# Altium PCB EJ8_ANALOG_PCB.PcbDoc
Units mm, origin at the board's own origin, x right, y up, seen from the top; angles counter-clockwise.
Board outline 46.74 x 76.2 mm, 2 copper layers (Top Layer, Bottom Layer); 31 components, 44 nets, 94 pads, 20 vias.
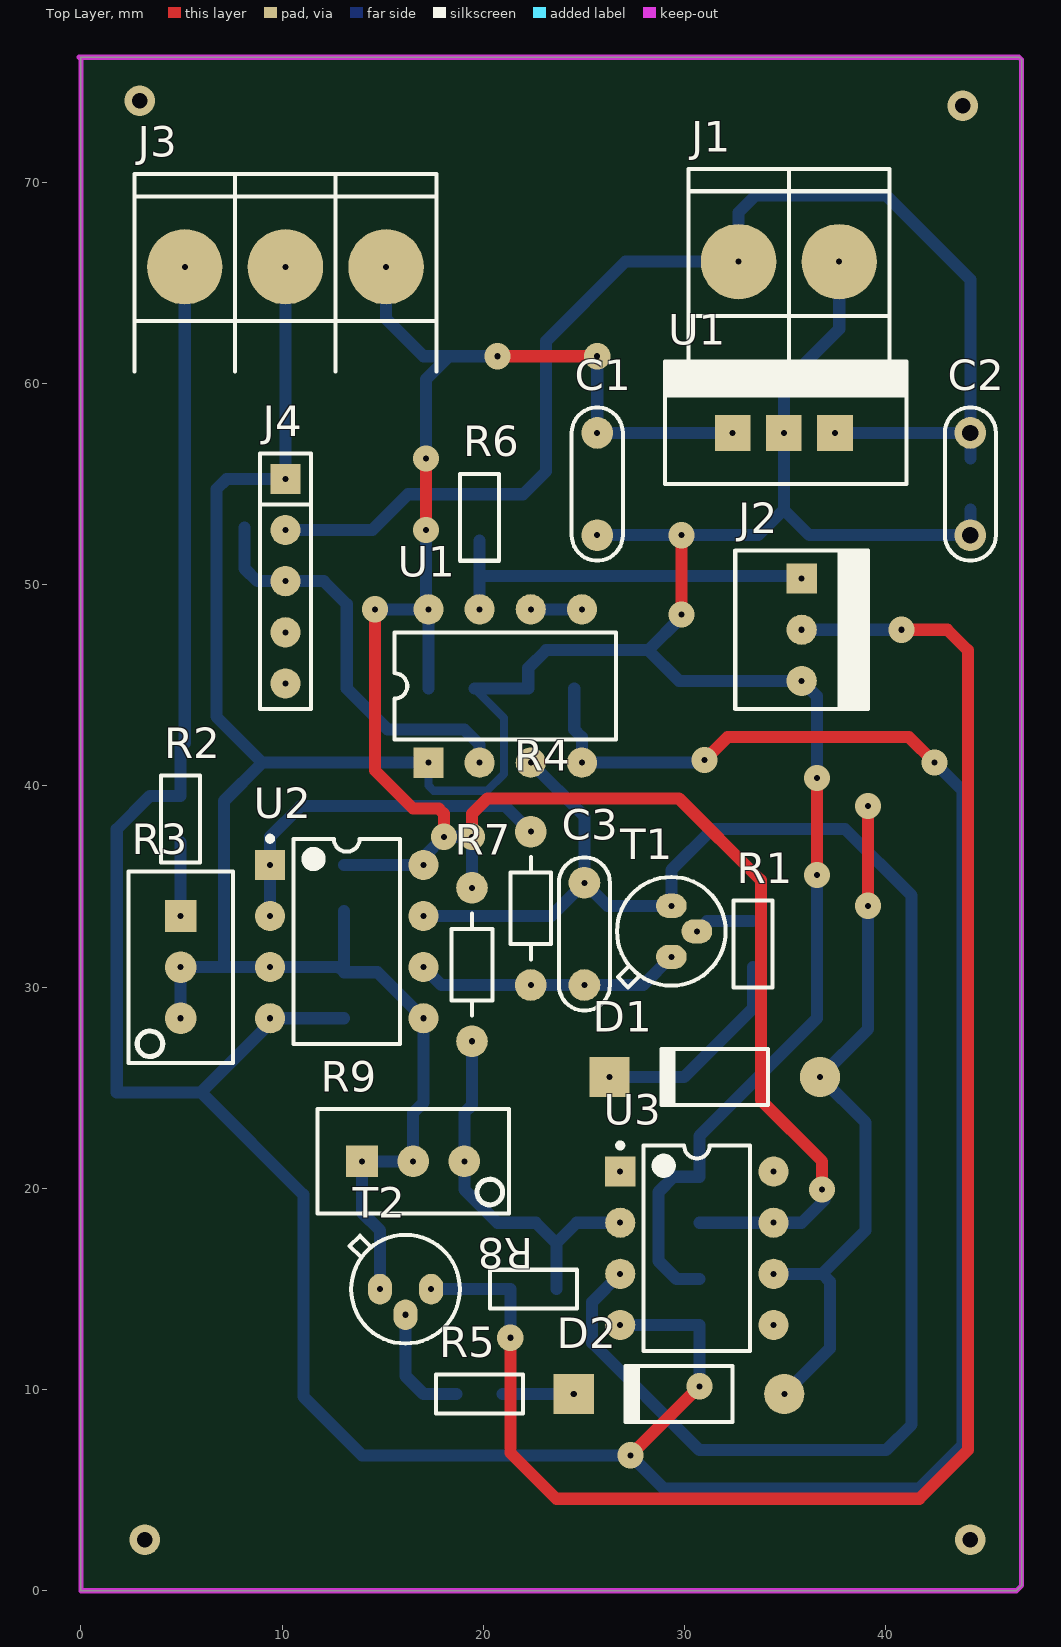
[diagram p0: Top Layer view]
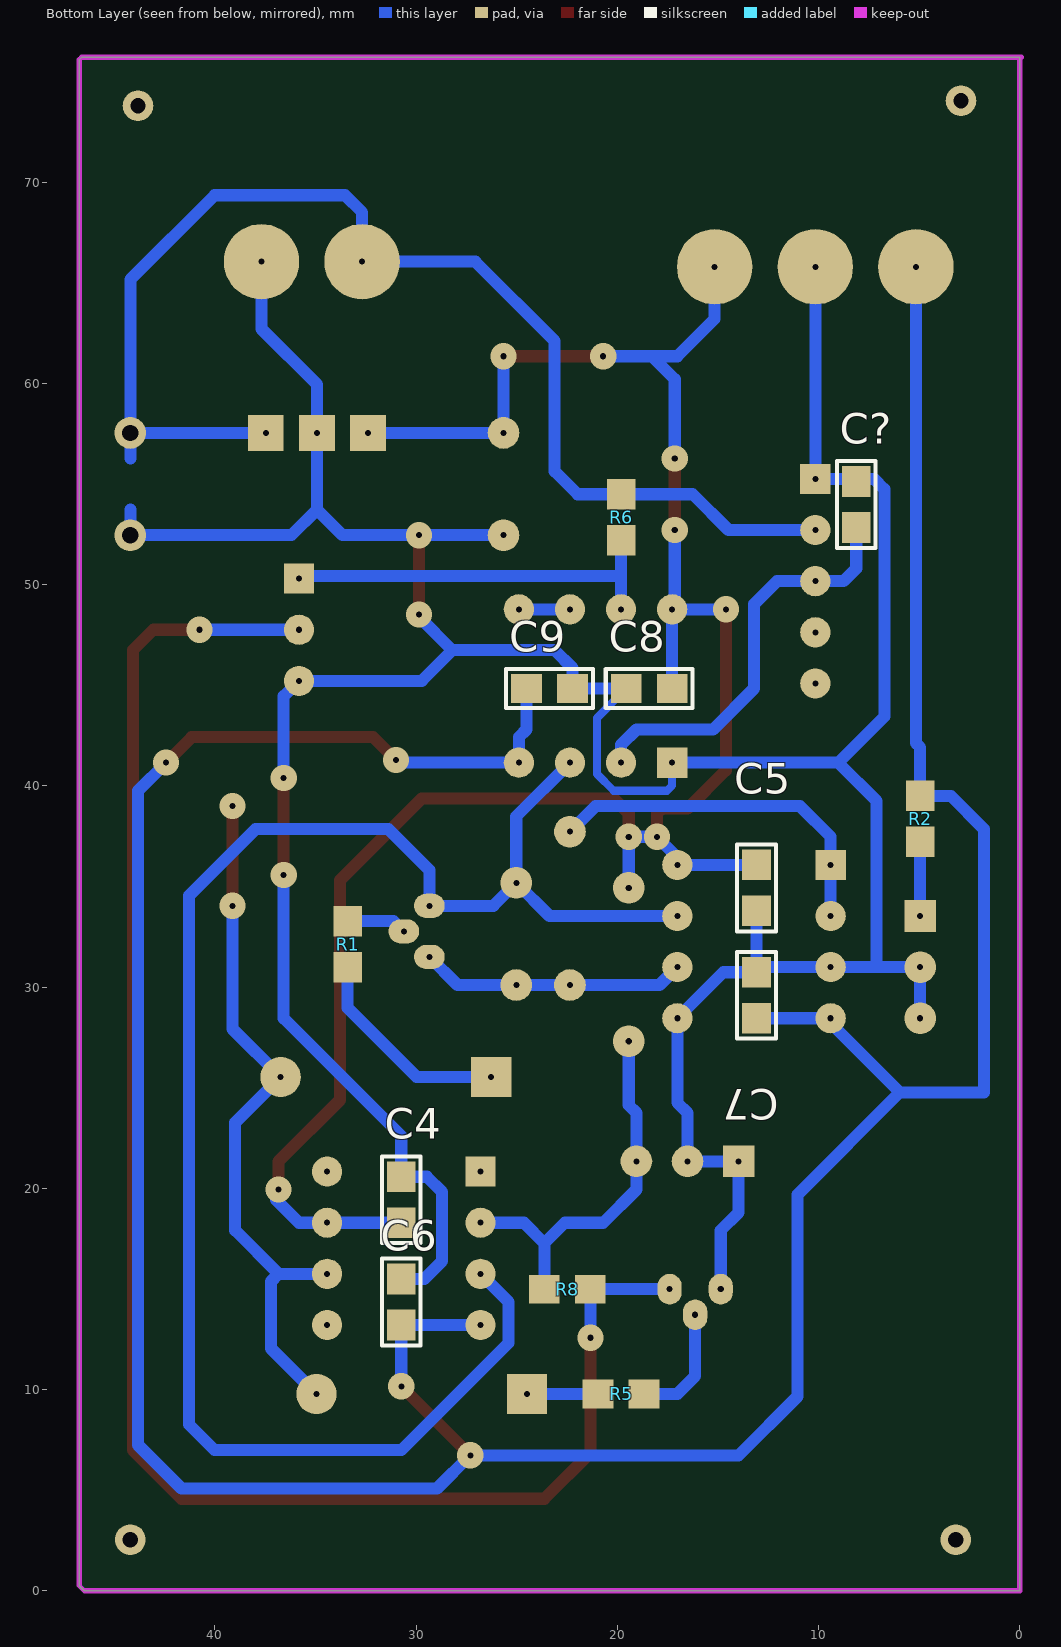
[diagram p1: Bottom Layer view, seen from below]

## Layer stack, top to bottom
Top Solder: solder mask 0.0102, Solder Resist, Dk 3.5
Top Layer: signal copper 0.0356
Dielectric 1: dielectric 0.32, FR-4, Dk 4.8
Bottom Layer: signal copper 0.0356
Bottom Solder: solder mask 0.0102, Solder Resist, Dk 3.5

## Board outline
0,0 0,76.2 46.609,76.2 46.641,76.168 46.704,76.105 46.736,76.073 46.736,0.254 46.482,0

## Design rules (kind name [scope] priority, off if disabled: settings)
Clearance [All] p1: gap=0.254 ignorepadtopadclearanceinfootprint=FALSE except(0: Arc-Hole Track-Hole SMDPad-Hole THPad-Hole Via-Hole Fill-Hole Poly-Hole Region-Hole Text-Hole)
PolygonConnect [All] p1: connectstyle=Relief reliefconductorwidth=0.254 reliefentries=4 polygonreliefangle="90 Angle" airgapwidth=0.254
RoutingVias [All] p1: holewidth=0.711 width=1.27 viastyle="Through Hole" minholewidth=0.711 minwidth=1.27 maxholewidth=0.711 maxwidth=1.27
SolderMaskExpansion [All] p1: expansion=0.102
Width [All] p1: maxlimit=0.6 minlimit=0.4 preferedwidth=0.6
30 further rules are at their usual default settings.

## Components (designator, comment, footprint, x,y, rotation, side; value= is the part's Value field where it differs from the comment)
C1 "330n" CAP200#1 25.654,54.991 r270 top
C2 "100n" CAP200#2 44.196,54.991 r270 top
C3 "100n" CAP200#1 25.019,32.639 r90 top
C4 "100n" 0805#1 30.734,19.431 r90 bottom
C5 "100n" 0805#1 13.081,34.925 r270 bottom
C6 "100n" 0805#1 30.734,14.351 r270 bottom
C7 "100n" 0805#1 13.081,29.591 r270 bottom
C8 "CAP" 0805#1 18.415,44.831 r0 bottom
C9 "CAP" 0805#1 23.368,44.831 r0 bottom
C? "100n" 0805#1 8.128,53.975 r90 bottom
D1 "Diode 1N4004" DO-41 31.496,25.527 r180 top
D2 "Diode 1N4004" DO-41 29.718,9.779 r180 top
J1 "5V_OUT" BORNERA2 35.179,66.04 r270 top
J2 "OUT" MOLEX3 35.814,50.292 r270 top
J3 "POWER" BORNERA3 10.16,65.786 r270 top
J4 "JOYSTICK" SIP5 10.16,55.245 r270 top
R1 "10k" 0805#2 33.401,32.131 r270 top
R2 "10k" 0805#2 4.953,38.354 r90 top
R3 "10k" "PRESET V" 4.953,30.988 r270 top
R4 "100k" RES300 22.352,37.719 r270 top
R5 "10k" 0805#2 19.812,9.779 r0 top
R6 "500" 0805#2 19.812,53.34 r90 top
R7 "15k" RES300 19.431,27.305 r90 top
R8 "100" 0805#2 22.479,14.986 r180 top
R9 "10k" "PRESET V" 16.51,21.336 r0 top
T1 "2N2222" TO18 29.337,32.766 r0 top
T2 "2N2222" TO18 16.129,14.986 r270 top
U1 "78XX" "TO-220 V" 34.925,57.531 r0 top
U1 "LM311N" DIP8 21.082,44.958 r0 top
U2 "" TI-P8 13.208,32.258 r0 top
U3 "" TI-P8 30.607,17.018 r0 top

## Footprints (in the part's own frame and the unit in brackets; to place one, negate y for a bottom-side part, rotate by r counter-clockwise, add the part's x,y. Pads: shape width x height; smd on the part's side, far side on the other; paste and mask are expansions set on the pad)
0805#1 [mil] "Pasivo 0805"
  rect 60x56 smd: 1(-45,0) 2(45,0)
  silkscreen extent -85,-38 85,38, body extent -40,-25 39,25, height 15
0805#2 [mil] "Pasivo 0805"
  rect 60x56 smd far side: 1(-45,0) 2(45,0)
  silkscreen extent -85,-38 85,38, body extent -40,-25 39,25, height 15
BORNERA2 [mm] "Bornera con Tornillos 5mm separación"
  round 3.75 hole 0.3: 1(0,2.5) 2(0,-2.5)
  silkscreen extent -4.6,-5 5.2,5, body extent -3.76,-4.89 3.94,5.61, height 10
BORNERA3 [mm] "Bornera con Tornillos 5mm separación"
  round 3.75 hole 0.3: 1(0,5) 2(0,0) 3(0,-5)
  silkscreen extent -4.6,-7.5 5.2,7.5, body extent -3.76,-7.39 3.94,8.11, height 10.05
CAP200#1 [mil]
  round 62 hole 11.81: 1(-100,0) 2(100,0)
  silkscreen extent -150,-50 150,50, body extent -110,-46 110,44, height 246
CAP200#2 [mil]
  round 62 hole 32: 1(-100,0) 2(100,0)
  silkscreen extent -150,-50 150,50, body extent -110,-46 110,44, height 246
DIP8 [mm] "DIP; 8 Leads; Row Spacing 7.62 mm; Pitch 2.54 mm"
  rect 1.5x1.5 hole 0.3: 1(-3.81,-3.81)
  round 1.5 hole 0.3: 2(-1.27,-3.81) 3(1.27,-3.81) 4(3.81,-3.81) 5(3.81,3.81) 6(1.27,3.81) 7(-1.27,3.81) 8(-3.81,3.81)
  silkscreen extent -5.5,-2.65 5.5,2.65
DO-41 [mm] "Diode, Axial; Body 5.2 x 2.7 mm (LxDia. max), Lead Dia. 0.86 mm (max)"
  round 2 hole 0.3: 1(-5.23,0)
  rect 2x2 hole 0.3: 2(5.23,0)
  silkscreen extent -2.65,-1.4 2.75,1.4
MOLEX3 [mm]
  rect 1.5x1.5 hole 0.3: 1(0,0)
  round 1.5 hole 0.3: 2(2.54,0) 3(5.08,0)
  silkscreen extent -1.4,-3.3 6.48,3.3, body extent -1.27,-3.18 6.35,3.18, height 10.74
"PRESET V" [mil]
  rect 62x62 hole 11.81: 1(-100,0)
  round 62 hole 11.81: 2(0,0) 3(100,0)
  silkscreen extent -188,-102 188,102, body extent -185,-95 190,95, height 455
RES300 [mil]
  round 62 hole 11.81: 1(0,0) 2(300,0)
  silkscreen extent 50,-40 250,40, body extent -10,-38 310,38, height 79
SIP5 [mm]
  rect 1.5x1.5 hole 0.3: 1(0,0)
  round 1.5 hole 0.3: 2(2.54,0) 3(5.08,0) 4(7.62,0) 5(10.16,0)
  silkscreen extent -1.27,-1.27 11.43,1.27, body extent -1.27,-1.27 11.43,1.27, height 8.38
TI-P8 [mm] "DIP, 8-Leads, Body 9.59x6.35mm, Pitch 2.54mm"
  rect 1.5x1.5 hole 0.3: 1(-3.81,3.81)
  round 1.5 hole 0.3: 2(-3.81,1.27) 3(-3.81,-1.27) 4(-3.81,-3.81) 5(3.81,-3.81) 6(3.81,-1.27) 7(3.81,1.27) 8(3.81,3.81)
  silkscreen extent -3.93,-5.1 2.65,5.23, body extent -3.95,-5.07 3.95,5.07, height 5.08
TO18 [mm]
  oval 1.524x1.2 hole 0.3: 1(1.27,0) 2(0,-1.27) 3(0,1.27)
  silkscreen extent -2.7,-2.78 2.7,2.7, body extent -2.79,-2.79 2.81,2.81, height 4.6
"TO-220 V" [mil]
  rect 70x70 hole 11.81: 1(-100,0) 2(0,0) 3(100,0)
  silkscreen extent -232,-100 240,139, body extent -197,-79 197,118, height 709

## Part data
C1 C2 C3 C4 C5 C6 C7 C?: library part CAP
D1 D2: "1 Amp General Purpose Rectifier", Code_JEDEC=DO-204-AL, ComponentLink1Description="Manufacturer Link", ComponentLink1URL=http://www.fairchildsemi.com/, ComponentLink2Description=Datasheet, ComponentLink2URL=http://www.fairchildsemi.com/ds/1N%2F1N4001.pdf, DatasheetVersion=1998, LatestRevisionDate=17-Jul-2002, LatestRevisionNote="Re-released for DXP Platform.", PackageDescription="Diode, Axial; Body 5.2 x 2.7 mm (LxDia. max), Lead Dia. 0.86 mm (max)", PackageReference=DO-41, PackageVersion=Aug-1999, Published=8-Jun-2000, Publisher="Altium Limited"
J1: library part "BORNERA 2"
J2: library part MOLEX3
J3: library part "BORNERA 3"
J4: library part CON5
R1 R2 R4 R5 R6 R7 R8: library part RES
R3 R9: library part PRESET
U1: "REGULDOR POSITIVO"
U1: "Voltage Comparator", Code_JEDEC=MO-001-AN, ComponentLink1Description="Manufacturer Link", ComponentLink1URL=http://www.st.com/, ComponentLink2Description=Datasheet, ComponentLink2URL=http://www.st.com/stonline/products/literature/ds/4848/lm211.pdf, DatasheetVersion=Oct-1997, LatestRevisionDate=06-Jun-2005, LatestRevisionNote="Stylized 3D Model Added.", PackageDescription="DIP; 8 Leads; Row Spacing 7.62 mm; Pitch 2.54 mm", PackageReference=DIP8, Published=24-Aug-2001, Publisher="Altium Limited"
U2: library part TL082CP, "JFET-Input Operational Amplifier, 7 to 36 V, 0 to 70 degC, 8-pin DIP (P8), Pb-Free (RoHS)", Manufacturer="Texas Instruments", Rating=Catalog, Supplier Part Number 1=296-1780-5-ND, Total Supply Voltage(Max)(+5V is 5, +/-5V is 10)=36, Total Supply Voltage(Min)(+5V is 5, +/-5V is 10)=7, CMRR(Min)(dB)=70, Code_JEDEC=MS-001, ComponentLink1Description="Manufacturer URL", ComponentLink1URL=http://www.ti.com/, ComponentLink2Description=Datasheet, ComponentLink2URL=http://www.ti.com/lit/ds/symlink/tl082.pdf, ComponentLink3Description="Package Specification", ComponentLink3URL=http://www.ti.com/litv/pdf/mpdi001b, DatasheetVersion=SLOS081G, Eco-Plan="Pb-Free (RoHS)", GBW(Typ)(MHz)=3, IIB(Max)(pA)=400, Iq per channel(Max)(mA)=2.8, Mounting Technology="Through Hole", Number of Channels=2, Offset Drift(Typ)(uV/C)=18, PackageDescription="8-Pin Plastic In-Line, Body 9.59 x 6.35 mm, Pitch 2.54 mm", PackageReference=P8, PackageVersion="4040082/E, 04/2010", PartNumber=TL082CP, Slew Rate(Typ)(V/us)=13, Sub Family="General Purpose Amplifier, High Supply Voltage Amplifier (>=30V)", Supplier 1=Digi-Key, Supplier 2=Farnell, Supplier 3=Newark, Supplier 4=Mouser, Supplier 5=Mouser, Supplier Part Number 2=1106017, Supplier Part Number 3=60K6991, Supplier Part Number 4=595-TL082CP, Supplier Part Number 5=N/A, Vio (25C)(Max)(mV)=15, Vn at 1kHz(Typ)(nV/rtHz)=18
U3: library part TL081CP, "JFET-Input Operational Amplifier, 7 to 36 V, 0 to 70 degC, 8-pin DIP (P8), Pb-Free (RoHS)", Manufacturer="Texas Instruments", Rating=Military, Supplier Part Number 1=296-7203-5-ND, Total Supply Voltage(Max)(+5V is 5, +/-5V is 10)=36, Total Supply Voltage(Min)(+5V is 5, +/-5V is 10)=7, CMRR(Min)(dB)=70, Code_JEDEC=MS-001, ComponentLink1Description="Manufacturer URL", ComponentLink1URL=http://www.ti.com/, ComponentLink2Description=Datasheet, ComponentLink2URL=http://www.ti.com/lit/ds/symlink/tl081.pdf, ComponentLink3Description="Package Specification", ComponentLink3URL=http://www.ti.com/litv/pdf/mpdi001b, DatasheetVersion=SLOS081G, Eco-Plan="Pb-Free (RoHS)", GBW(Typ)(MHz)=3, IIB(Max)(pA)=400, Iq per channel(Max)(mA)=2.8, Mounting Technology="Through Hole", Number of Channels=1, Offset Drift(Typ)(uV/C)=18, PackageDescription="8-Pin Plastic In-Line, Body 9.59 x 6.35 mm, Pitch 2.54 mm", PackageReference=P8, PackageVersion="4040082/E, 04/2010", PartNumber=TL081CP, Slew Rate(Typ)(V/us)=13, Sub Family="General Purpose Amplifier, High Supply Voltage Amplifier (>=30V)", Supplier 1=Digi-Key, Supplier 2=Farnell, Supplier 3=Newark, Supplier 4=Mouser, Supplier Part Number 2=1103002, Supplier Part Number 3=08F9317, Supplier Part Number 4=595-TL081CP, Vio (25C)(Max)(mV)=15, Vn at 1kHz(Typ)(nV/rtHz)=18

## Free pads (board coordinates)
  round 1.524 hole 0.762: 2(2.921,74.041) 3(3.175,2.54) 4(44.196,2.54) 5(43.815,73.787)

## Via types
v1: diameter 1.3, hole 0.3, Top Layer to Bottom Layer, 20 vias

## Nets (pads, with @x,y where several pads share a name; then routed paths per layer and width w, separated by ;. In a path a pad name is that pad's centre, name@x,y a point inside that pad or via, vN(x,y) a via of type N, cw(c..) or ccw(c..) an arc to the next point about the centre after c; other vN are vias at no path point)
5V: C2.1 J1.2 J4.2 R6.2 U1.3@37.465,57.531 | length 63.5
  Bottom Layer w0.6: J4.2 14.478,52.705 16.256,54.483 R6.2 21.971,54.483 23.114,55.626 23.114,62.103 27.051,66.04 J1.2 32.679,68.493 33.528,69.342 40.005,69.342 44.196,65.151 C2.1 ; U1.3@37.465,57.531 C2.1 ; 44.196,56.261 C2.1
555_CLK: 
+15V: C1.1 C4.1 C5.1 C8.1 J3.1 R7.2 U1.1@32.385,57.531 U1.8 U2.8 U3.7 | length 108.1
  Top Layer w0.6: v1(14.605,48.768) 14.605,40.767 16.51,38.862 17.78,38.862 18.034,38.608 v1(18.034,37.465) ; v1(17.145,52.705) v1(17.145,56.261) ; v1(19.431,37.465) 19.431,38.608 20.193,39.37 29.718,39.37 33.782,35.306 33.782,24.384 36.83,21.336 v1(36.83,19.939) ; v1(20.701,61.341) v1(25.654,61.341)
  Bottom Layer w0.6: C5.1 U2.8 17.018,36.449 v1(18.034,37.465) v1(19.431,37.465) R7.2 ; v1(14.605,48.768) U1.8 ; J3.1 15.16,63.199 17.018,61.341 18.288,61.341 ; v1(17.145,52.705) 17.145,48.895 U1.8 ; v1(17.145,56.261) 17.145,60.198 18.288,61.341 ; C8.1 U1.8 ; v1(20.701,61.341) 18.288,61.341 ; v1(25.654,61.341) C1.1 U1.1@32.385,57.531 ; C4.1 U3.7 35.814,18.288 v1@36.957,19.431
-15V: C6.2 C7.2 C9.2 J3.3 R2.2 U1.4 U2.4 U3.4 | length 177.8
  Top Layer w0.6: v1(27.305,6.731) v1(30.734,10.16) ; v1(30.988,41.275) 32.131,42.418 41.148,42.418 v1(42.418,41.148)
  Bottom Layer w0.6: J3.3 5.16,42.117 4.953,41.91 R2.2 3.429,39.497 1.778,37.846 1.778,24.765 5.969,24.765 ; C7.2 U2.4 9.398,28.194 5.969,24.765 ; C9.2 24.511,42.799 24.892,42.418 U1.4 30.861,41.148 v1(30.988,41.275) ; U3.4 C6.2 v1(30.734,10.16) ; v1(42.418,41.148) 43.815,39.751 43.815,7.239 41.656,5.08 28.956,5.08 v1(27.305,6.731) 13.97,6.731 11.049,9.652 11.049,19.685 5.969,24.765
AND_OUT: 
COMP_OUT: J2.1 R6.1 U1.7 | length 19.5
  Bottom Layer w0.6: U1.7 19.812,50.419 ; R6.1 19.812,50.419 ; J2.1 35.687,50.419 19.812,50.419
COMP_OUT_N: 
COUNT_CLK: 
COUNT_RST: 
COUNT_RST_IN: 
COUNTER_RST: J2.2 R8.2 T2.3 | length 85.2
  Top Layer w0.6: v1(21.336,12.573) 21.336,6.858 23.622,4.572 41.656,4.572 44.069,6.985 44.069,46.736 43.053,47.752 v1(40.767,47.752)
  Bottom Layer w0.6: T2.3 R8.2 v1(21.336,12.573) ; J2.2 v1(40.767,47.752)
GND: C1.2 C2.2 C4.2 C5.2 C6.1 C7.1 C8.2 C9.1 C?.2 J1.1 J2.3 J3.2 J4.1 R3.2 R3.3 R9.1 R9.2 T2.2 U1.1@17.272,41.148 U1.2@34.925,57.531 U2.3 U2.5 | length 187.9
  Top Layer w0.6: v1(29.845,48.514) v1(29.845,52.451) ; v1(36.576,35.56) v1(36.576,40.386)
  Bottom Layer w0.4: U1.1@17.272,41.148 17.272,40.005 17.526,39.751 20.179,39.751 21.016,40.588 21.016,43.373 C8.2
  Bottom Layer w0.6: R3.3 R3.2 7.112,30.988 ; J3.2 J4.1 7.239,55.245 6.731,54.737 6.731,43.434 9.017,41.148 ; C5.2 C7.1 ; T2.2 14.859,17.907 13.97,18.796 R9.1 R9.2 16.51,23.749 17.018,24.257 U2.5 14.732,30.734 C7.1 ; U1.1@17.272,41.148 9.017,41.148 ; C8.2 C9.1 22.225,45.847 23.114,46.736 28.194,46.736 ; C1.2 v1(29.845,52.451) 33.655,52.451 34.925,53.721 ; v1(29.845,48.514) 29.845,48.387 28.194,46.736 ; C6.1 29.591,15.494 28.702,16.383 28.702,19.812 29.464,20.574 C4.2 30.734,22.606 36.576,28.448 v1(36.576,35.56) ; v1(36.576,40.386) 36.576,44.45 J2.3 29.718,45.212 28.194,46.736 ; J1.1 37.679,62.698 34.925,59.944 34.925,57.531 34.925,53.721 ; 44.196,53.721 C2.2 36.195,52.451 34.925,53.721 ; 7.112,30.988 7.112,39.243 9.017,41.148 ; 7.112,30.988 U2.3 12.827,30.988 C7.1
JOY_IN: C?.1 J4.3 U1.2@19.812,41.148 | length 20.7
  Bottom Layer w0.6: C?.1 8.128,50.8 8.763,50.165 J4.3 12.065,50.165 13.208,49.022 13.208,44.831 15.24,42.799 19.05,42.799 19.812,42.037 U1.2@19.812,41.148
LE: 
NetC3_1: C3.1 R4.2 T1.2 U2.6 | length 13.3
  Bottom Layer w0.6: U2.6 17.907,30.099 R4.2 C3.1 27.94,30.099 T1.2
NetD1_1: D1.1 D2.1 U3.6 | length 35.5
  Top Layer w0.6: v1(39.116,34.036) v1(39.116,38.989)
  Bottom Layer w0.6: U3.6 36.83,15.748 ; D2.1 37.211,12.042 37.211,15.367 36.83,15.748 ; v1(39.116,34.036) 39.116,27.917 D1.1 38.989,23.264 38.989,17.907 36.83,15.748
NetD1_2: D1.2 R1.2 | length 10.6
  Bottom Layer w0.6: D1.2 29.972,25.527 33.401,28.956 R1.2
NetD2_2: D2.2 R5.2 | length 3.5
  Bottom Layer w0.6: R5.2 D2.2
NetR1_1: R1.1 T1.1 | length 3
  Bottom Layer w0.6: T1.1 31.115,33.274 R1.1
NetR2_1: R2.1 R3.1 | length 3.7
  Bottom Layer w0.6: R3.1 R2.1
NetR4_1: R4.1 U2.1 U2.2 | length 18
  Bottom Layer w0.6: U2.2 U2.1 9.398,37.465 10.922,38.989 21.082,38.989 R4.1
NetR5_1: R5.1 T2.1 | length 6
  Bottom Layer w0.6: T2.1 16.129,10.668 17.018,9.779 R5.1
NetR7_1: R7.1 R8.1 R9.3 U3.2 | length 19.1
  Bottom Layer w0.6: R7.1 19.431,24.13 19.05,23.749 R9.3 19.05,19.939 20.701,18.288 22.606,18.288 23.622,17.272 ; R8.1 23.622,17.272 ; U3.2 24.638,18.288 23.622,17.272
NetU1_5: U1.5 U1.6 | length 2.5
  Bottom Layer w0.6: U1.6 U1.5
NetU4_10: 
Q0A: 
Q0A_L: 
Q0B: 
Q0B_L: 
Q1A: 
Q1A_L: 
Q1B: 
Q1B_L: 
Q2A: 
Q2A_L: 
Q2B: 
Q2B_L: 
Q3A: 
Q3A_L: 
Q3B: 
Q3B_L: 
RAMP: C3.2 T1.3 U1.3@22.352,41.148 U2.7 U3.3 | length 85.4
  Bottom Layer w0.6: U2.7 23.368,33.528 C3.2 ; U1.3@22.352,41.148 25.019,38.481 C3.2 ; U3.3 25.4,14.351 25.4,12.319 30.734,6.985 40.005,6.985 41.275,8.255 41.275,34.544 37.973,37.846 31.369,37.846 29.337,35.814 T1.3 26.162,34.036 C3.2
VCC: 
VDD: 
pads on no net: J4.4 J4.5 U3.1 U3.5 U3.8

## Keep-outs
Keep-Out Layer:
  lines w0.254: -0.085,76.2 0.254,76.2 ; 0,0 0,68.707 0,69.342 0,75.946 0,76.2 11.652,76.2 34.957,76.2 46.609,76.2 46.641,76.168 46.704,76.105 46.736,76.073 46.736,69.215 46.736,0.254 46.482,0 0,0

## Dimensions
0,0 to 46.482,0 on Keep-Out Layer
0,0 to 11.652,76.2 on Keep-Out Layer